# Altium PCB PCB4.PcbDoc (part 2 of 3)
Units mm, origin at the board's own origin, x right, y up, seen from the top; angles counter-clockwise.
Board outline 185.25 x 140.25 mm, 2 copper layers (Top Layer, Bottom Layer); 401 components, 60 nets, 1114 pads, 228 vias.
Unrouted connection lines stored in the file: 2.
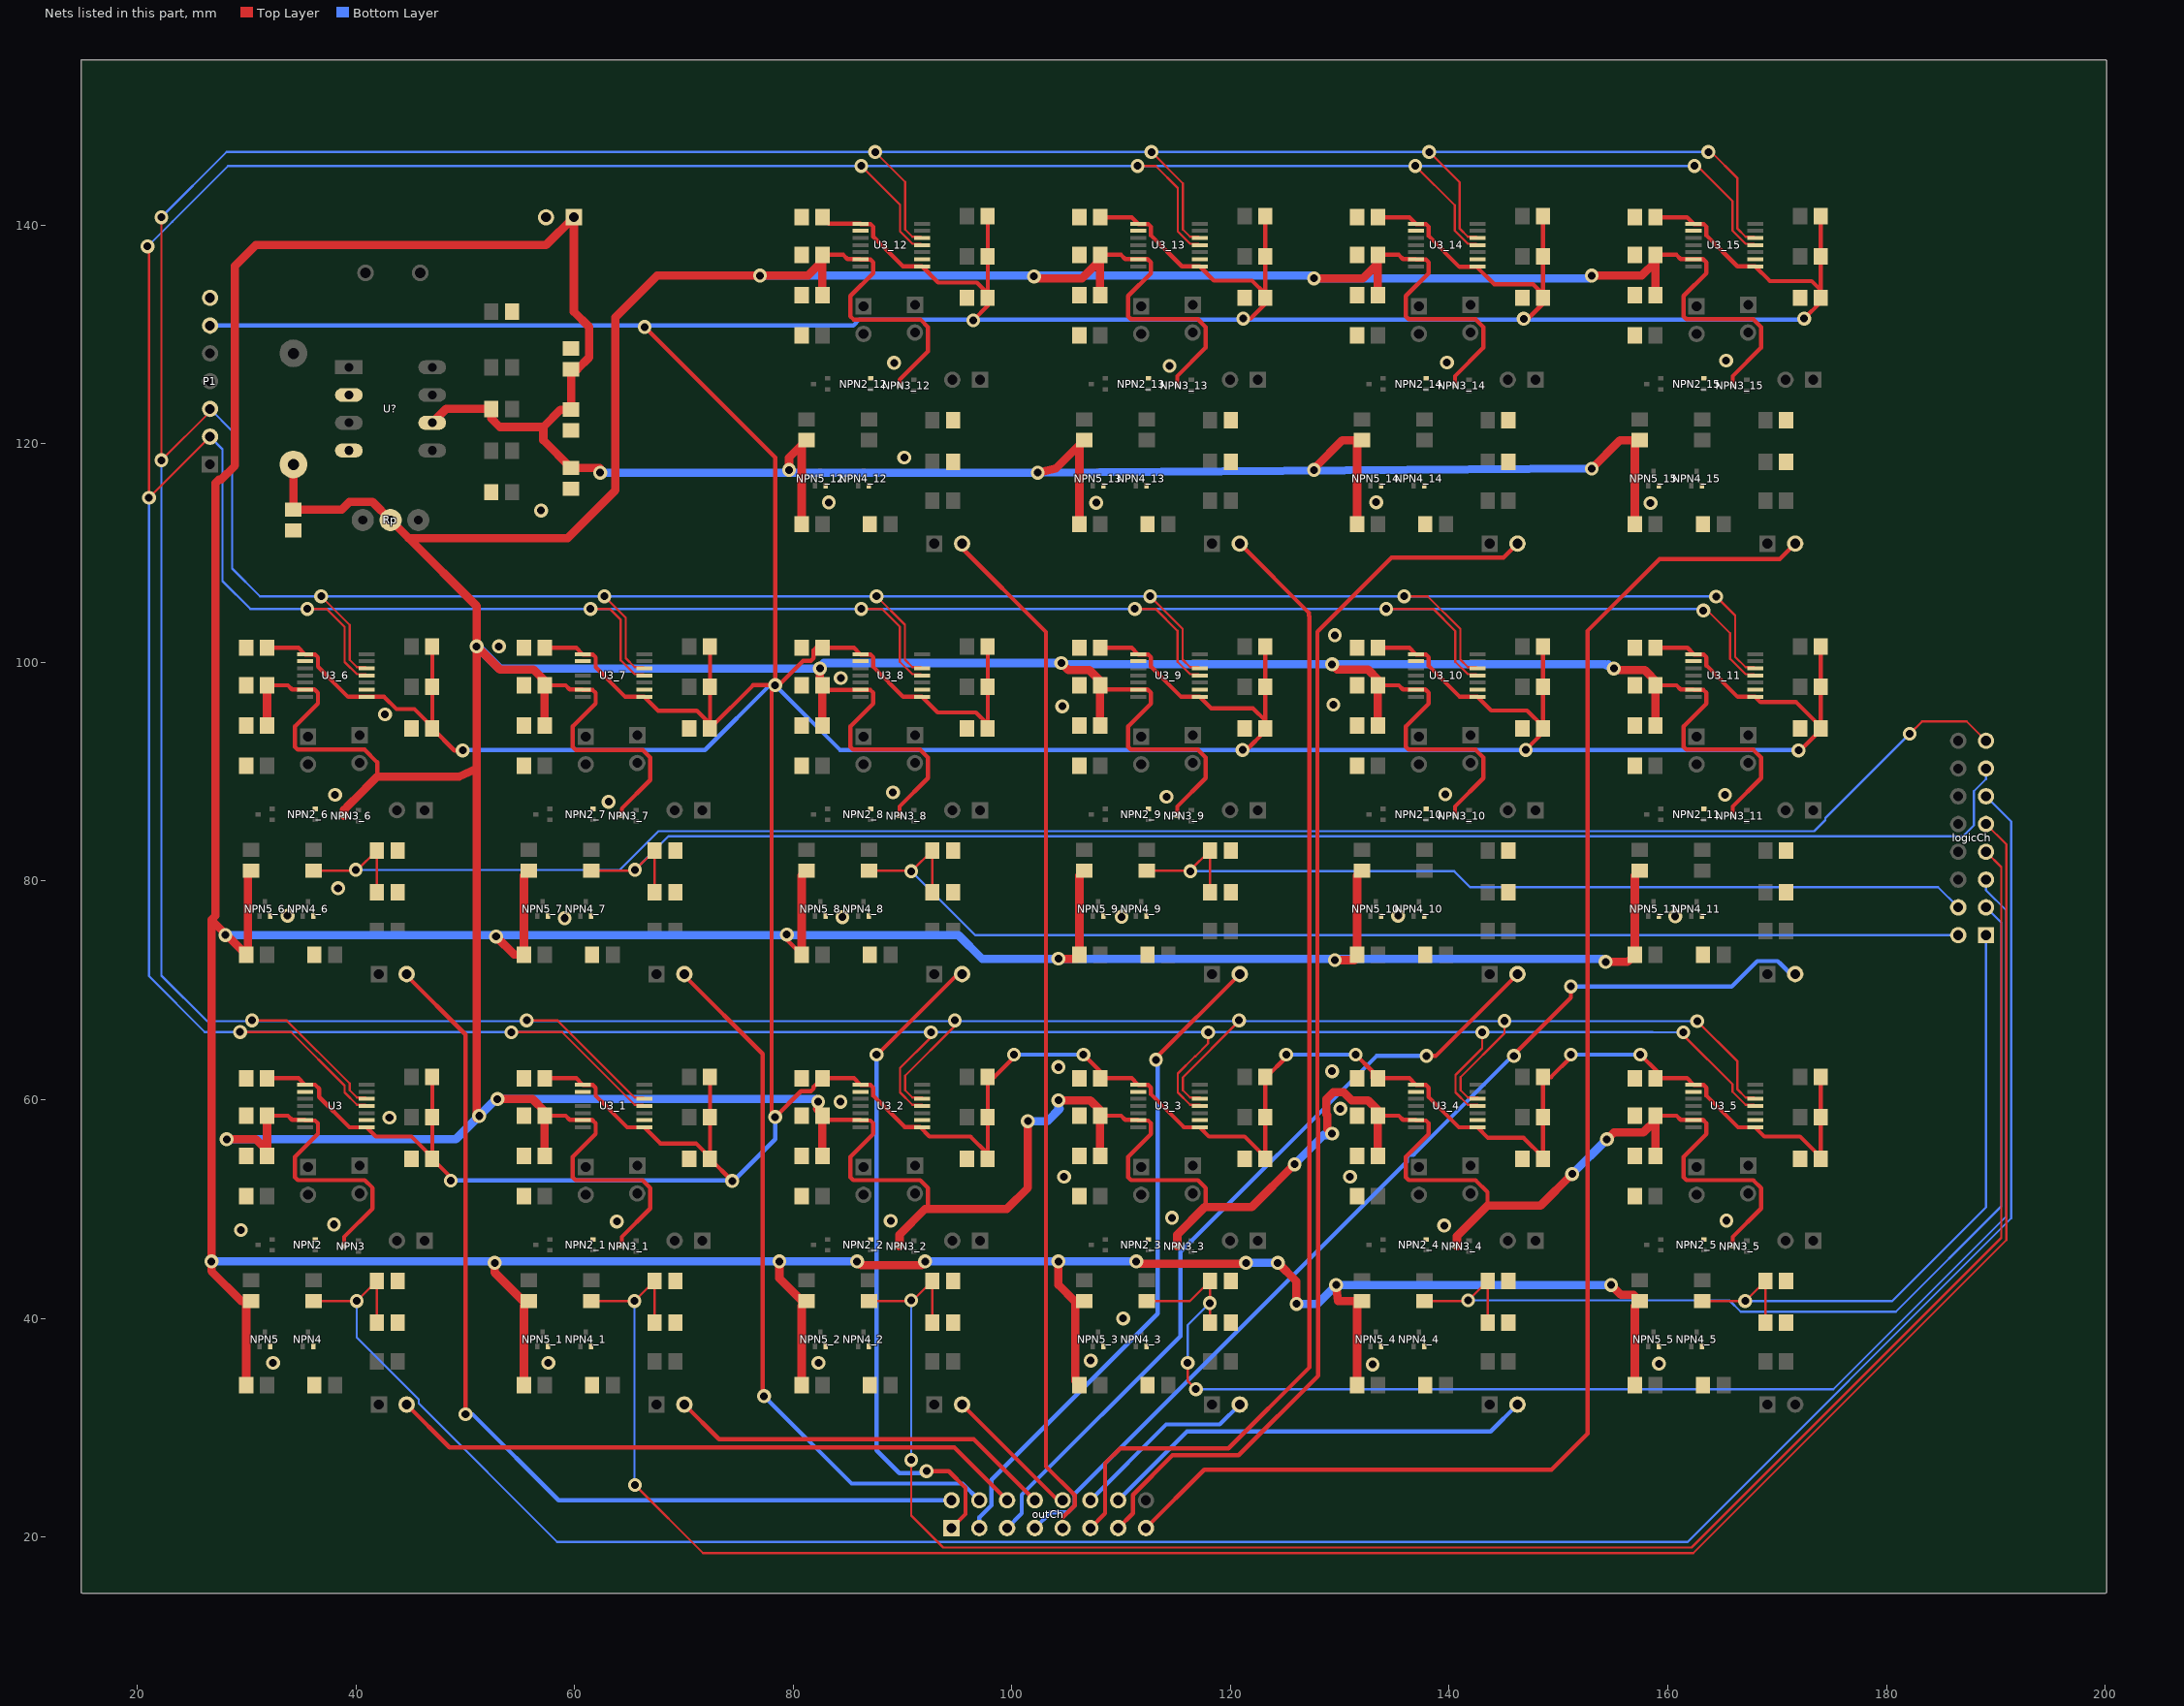
[diagram p2: the nets of this part, all layers, seen from the top]

## Part data
C1 C1_1 C1_2 C1_3 C1_4 C1_5 C1_6 C1_7 C1_8 C1_9 C1_10 C1_11 C1_12 C1_13 C1_14 C1_15 C2 C2_1 C2_2 C2_3 C2_4 C2_5 C2_6 C2_7 C2_8 C2_9 C2_10 C2_11 C2_12 C2_13 C2_14 C2_15 C3 C3_1 C3_2 C3_3 C3_4 C3_5 C3_6 C3_7 C3_8 C3_9 C3_10 C3_11 C3_12 C3_13 C3_14 C3_15 CD1 CD1_1 CD1_2 CD1_3 CD1_4 CD1_5 CD1_6 CD1_7 CD1_8 CD1_9 CD1_10 CD1_11 CD1_12 CD1_13 CD1_14 CD1_15 CD2 CD2_1 CD2_2 CD2_3 CD2_4 CD2_5 CD2_6 CD2_7 CD2_8 CD2_9 CD2_10 CD2_11 CD2_12 CD2_13 CD2_14 CD2_15 CD3 CD3_1 CD3_2 CD3_3 CD3_4 CD3_5 CD3_6 CD3_7 CD3_8 CD3_9 CD3_10 CD3_11 CD3_12 CD3_13 CD3_14 CD3_15 CD4 CD4_1 CD4_2 CD4_3 CD4_4 CD4_5 CD4_6 CD4_7 CD4_8 CD4_9 CD4_10 CD4_11 CD4_12 CD4_13 CD4_14 CD4_15 CD5 CD5_1 CD5_2 CD5_3 CD5_4 CD5_5 CD5_6 CD5_7 CD5_8 CD5_9 CD5_10 CD5_11 CD5_12 CD5_13 CD5_14 CD5_15 Co Cs1 Cs2 Cs3 Ct: "Capacitor"
H1 H1_1 H1_2 H1_3 H1_4 H1_5 H1_6 H1_7 H1_8 H1_9 H1_10 H1_11 H1_12 H1_13 H1_14 H1_15 HD1 HD1_1 HD1_2 HD1_3 HD1_4 HD1_5 HD1_6 HD1_7 HD1_8 HD1_9 HD1_10 HD1_11 HD1_12 HD1_13 HD1_14 HD1_15 HD2 HD2_1 HD2_2 HD2_3 HD2_4 HD2_5 HD2_6 HD2_7 HD2_8 HD2_9 HD2_10 HD2_11 HD2_12 HD2_13 HD2_14 HD2_15: library part "Header 2", "Header, 2-Pin"
H2 H2_1 H2_2 H2_3 H2_4 H2_5 H2_6 H2_7 H2_8 H2_9 H2_10 H2_11 H2_12 H2_13 H2_14 H2_15 P2: "Header, 2-Pin"
L: "power inductor"
logicCh outCh: "Header, 8-Pin, Dual row"
NPN1 NPN1_1 NPN1_2 NPN1_3 NPN1_4 NPN1_5 NPN1_6 NPN1_7 NPN1_8 NPN1_9 NPN1_10 NPN1_11 NPN1_12 NPN1_13 NPN1_14 NPN1_15 NPN2 NPN2_1 NPN2_2 NPN2_3 NPN2_4 NPN2_5 NPN2_6 NPN2_7 NPN2_8 NPN2_9 NPN2_10 NPN2_11 NPN2_12 NPN2_13 NPN2_14 NPN2_15 NPN3 NPN3_1 NPN3_2 NPN3_3 NPN3_4 NPN3_5 NPN3_6 NPN3_7 NPN3_8 NPN3_9 NPN3_10 NPN3_11 NPN3_12 NPN3_13 NPN3_14 NPN3_15 NPN4 NPN4_1 NPN4_2 NPN4_3 NPN4_4 NPN4_5 NPN4_6 NPN4_7 NPN4_8 NPN4_9 NPN4_10 NPN4_11 NPN4_12 NPN4_13 NPN4_14 NPN4_15 NPN5 NPN5_1 NPN5_2 NPN5_3 NPN5_4 NPN5_5 NPN5_6 NPN5_7 NPN5_8 NPN5_9 NPN5_10 NPN5_11 NPN5_12 NPN5_13 NPN5_14 NPN5_15: library part Component_1
P1: "Header, 7-Pin"
R1 R1_1 R1_2 R1_3 R1_4 R1_5 R1_6 R1_7 R1_8 R1_9 R1_10 R1_11 R1_12 R1_13 R1_14 R1_15 R2 R2_1 R2_2 R2_3 R2_4 R2_5 R2_6 R2_7 R2_8 R2_9 R2_10 R2_11 R2_12 R2_13 R2_14 R2_15 R3 R3_1 R3_2 R3_3 R3_4 R3_5 R3_6 R3_7 R3_8 R3_9 R3_10 R3_11 R3_12 R3_13 R3_14 R3_15 R4 R4_1 R4_2 R4_3 R4_4 R4_5 R4_6 R4_7 R4_8 R4_9 R4_10 R4_11 R4_12 R4_13 R4_14 R4_15 RD1 RD1_1 RD1_2 RD1_3 RD1_4 RD1_5 RD1_6 RD1_7 RD1_8 RD1_9 RD1_10 RD1_11 RD1_12 RD1_13 RD1_14 RD1_15 RD2 RD2_1 RD2_2 RD2_3 RD2_4 RD2_5 RD2_6 RD2_7 RD2_8 RD2_9 RD2_10 RD2_11 RD2_12 RD2_13 RD2_14 RD2_15 Rs1 Rs2 Rs4 Rsc: "Resistor"
Rp: "Potentiometer"
U3 U3_1 U3_2 U3_3 U3_4 U3_5 U3_6 U3_7 U3_8 U3_9 U3_10 U3_11 U3_12 U3_13 U3_14 U3_15: "Imported"

## Via types
v1: diameter 1.27, hole 0.711, Top Layer to Bottom Layer, 228 vias

## Nets (pads, with @x,y where several pads share a name; then routed paths per layer and width w, separated by ;. In a path a pad name is that pad's centre, name@x,y a point inside that pad or via, vN(x,y) a via of type N, cw(c..) or ccw(c..) an arc to the next point about the centre after c; other vN are vias at no path point)
3V: CD1.1 CD1_1.1 CD1_2.1 CD1_3.1 CD1_4.1 CD1_5.1 CD1_6.1 CD1_7.1 CD1_8.1 CD1_9.1 CD1_10.1 CD1_11.1 CD1_12.1 CD1_13.1 CD1_14.1 CD1_15.1 CD2.1 CD2_1.1 CD2_2.1 CD2_3.1 CD2_4.1 CD2_5.1 CD2_6.1 CD2_7.1 CD2_8.1 CD2_9.1 CD2_10.1 CD2_11.1 CD2_12.1 CD2_13.1 CD2_14.1 CD2_15.1 P1.6 RD1.2 RD1_1.2 RD1_2.2 RD1_3.2 RD1_4.2 RD1_5.2 RD1_6.2 RD1_7.2 RD1_8.2 RD1_9.2 RD1_10.2 RD1_11.2 RD1_12.2 RD1_13.2 RD1_14.2 RD1_15.2 RD2.1 RD2_1.1 RD2_2.1 RD2_3.1 RD2_4.1 RD2_5.1 RD2_6.1 RD2_7.1 RD2_8.1 RD2_9.1 RD2_10.1 RD2_11.1 RD2_12.1 RD2_13.1 RD2_14.1 RD2_15.1 U3.1 U3.8 U3_1.1 U3_1.8 U3_2.1 U3_2.8 U3_3.1 U3_3.8 U3_4.1 U3_4.8 U3_5.1 U3_5.8 U3_6.1 U3_6.8 U3_7.1 U3_7.8 U3_8.1 U3_8.8 U3_9.1 U3_9.8 U3_10.1 U3_10.8 U3_11.1 U3_11.8 U3_12.1 U3_12.8 U3_13.1 U3_13.8 U3_14.1 U3_14.8 U3_15.1 U3_15.8 | length 884.1
  Top Layer w0.381: CD1.1@31.882,61.973 34.762,61.973 U3.1@35.352,61.383 36.28,61.383 36.647,61.016 36.647,60.254 39.418,57.483 U3.8@40.99,57.483 41.832,56.642 45.089,56.642 CD2.1@46.995,54.736 ; CD1_6.1@31.882,101.343 34.762,101.343 U3_6.1@35.352,100.753 35.379,100.725 36.272,100.725 36.533,100.465 36.533,99.622 39.301,96.853 U3_6.8@40.99,96.853 42.596,96.853 43.715,95.734 45.367,95.734 CD2_6.1@46.995,94.106 ; RD1.2@46.995,62.079 RD2.1@46.995,58.417 CD2.1@46.995,54.607 48.692,52.91 v1(48.692,52.603) ; RD1_6.2@46.995,101.449 RD2_6.1@46.995,97.787 CD2_6.1@46.995,94.106 ; v1(49.784,91.948) 49.027,91.948 46.995,93.98 CD2_6.1@46.995,94.106 ; CD1_1.1@57.282,61.973 60.162,61.973 U3_1.1@60.752,61.383 60.779,61.355 61.672,61.355 61.933,61.095 61.933,60.368 62.438,59.863 62.449,59.863 64.828,57.483 U3_1.8@66.39,57.483 67.867,56.007 71.124,56.007 CD2_1.1@72.395,54.736 ; CD1_7.1@57.282,101.343 60.162,101.343 U3_7.1@60.752,100.753 60.779,100.725 61.672,100.725 61.933,100.465 61.933,99.572 64.652,96.853 U3_7.8@66.39,96.853 67.663,95.58 71.196,95.58 CD2_7.1@72.395,94.381 ; v1(66.421,130.683) 78.359,118.745 v1(78.359,97.917) ; RD1_1.2@72.395,62.079 RD2_1.1@72.395,58.417 CD2_1.1@72.395,54.607 74.422,52.58 v1(74.422,52.578) ; CD2_7.1@72.395,93.977 76.335,97.917 v1(78.359,97.917) ; CD2_7.1@72.395,93.98 CD2_7.1@72.395,94.381 ; RD1_7.2@72.395,101.449 RD2_7.1@72.395,97.787 CD2_7.1@72.395,94.381 ; CD1_12.1@82.682,140.713 83.272,140.123 U3_12.1@86.152,140.123 86.179,140.095 87.072,140.095 87.333,139.835 87.333,138.942 90.052,136.223 U3_12.8@91.79,136.223 93.267,134.747 96.804,134.747 CD2_12.1@97.787,133.764 ; v1(96.469,131.293) 97.787,132.611 CD2_12.1@97.787,133.347 ; CD2_8.1@97.795,93.977 CD2_8.1@97.795,94.356 ; RD1_8.2@97.795,101.449 RD2_8.1@97.795,97.787 CD2_8.1@97.795,94.356 ; CD2_12.1@97.795,133.35 RD2_12.1@97.795,137.157 RD1_12.2@97.795,140.819 ; v1@100.203,63.881 98.401,62.079 RD1_2.2@97.795,62.079 RD2_2.1@97.795,58.417 97.795,55.067 96.22,56.642 92.46,56.642 91.591,57.511 90.2,57.511 87.849,59.863 87.838,59.863 87.333,60.368 87.333,61.095 87.072,61.355 86.179,61.355 U3_2.1@86.152,61.383 85.562,61.973 CD1_2.1@82.682,61.973 82.682,61.97 82.281,61.57 82.267,61.57 81.877,61.179 81.877,61.039 81.616,60.779 80.718,60.779 v1(78.359,58.42) 78.029,58.75 78.029,97.333 78.486,97.79 v1(78.359,97.917) ; v1(106.553,64.135) 108.082,62.606 CD1_3.1@108.082,61.973 110.962,61.973 U3_3.1@111.552,61.383 111.579,61.355 112.472,61.355 112.733,61.095 112.733,60.495 115.745,57.483 U3_3.8@117.19,57.483 118.032,56.642 121.289,56.642 123.195,54.736 CD2_3.1@123.195,54.607 RD1_3.2@123.195,62.079 ; CD1_9.1@108.082,101.343 110.962,101.343 U3_9.1@111.552,100.753 111.579,100.725 112.472,100.725 112.733,100.465 112.733,99.611 115.491,96.853 U3_9.8@117.19,96.853 118.235,95.809 122.047,95.809 CD2_9.1@123.195,94.661 ; CD1_13.1@108.082,140.713 110.962,140.713 U3_13.1@111.552,140.123 111.579,140.095 112.472,140.095 112.733,139.835 112.733,139.042 115.552,136.223 U3_13.8@117.19,136.223 118.489,134.925 121.971,134.925 CD2_13.1@123.195,133.701 ; v1(121.158,131.445) 121.818,131.445 123.195,132.822 CD2_13.1@123.195,133.347 ; v1@121.412,91.948 123.195,93.731 CD2_9.1@123.195,93.977 ; CD2_9.1@123.195,93.98 CD2_9.1@123.195,94.661 ; RD1_9.2@123.195,101.449 RD2_9.1@123.195,97.787 CD2_9.1@123.195,94.661 ; CD2_13.1@123.195,133.35 CD2_13.1@123.195,133.701 ; RD1_13.2@123.195,140.819 RD2_13.1@123.195,137.157 CD2_13.1@123.195,133.701 ; RD1_3.2@123.293,62.079 v1@125.095,63.881 ; v1(131.445,64.135) 132.974,62.606 CD1_4.1@132.974,61.973 ; CD1_4.1@133.482,61.973 136.362,61.973 U3_4.1@136.952,61.383 136.979,61.355 137.872,61.355 138.133,61.095 138.133,60.241 140.891,57.483 U3_4.8@142.59,57.483 143.559,56.515 146.816,56.515 148.595,54.736 RD2_4.1@148.595,58.417 RD1_4.2@148.595,62.079 149.328,62.079 v1@151.13,63.881 ; CD1_10.1@133.482,101.343 136.362,101.343 U3_10.1@136.952,100.753 136.979,100.725 137.872,100.725 138.133,100.465 138.133,99.687 140.967,96.853 U3_10.8@142.59,96.853 143.838,95.606 147.117,95.606 148.595,94.127 RD2_10.1@148.595,97.787 RD1_10.2@148.595,101.449 ; CD1_14.1@133.482,140.713 136.362,140.713 U3_14.1@136.952,140.123 136.979,140.095 137.872,140.095 138.133,139.835 138.133,138.992 140.95,136.175 142.542,136.175 144.122,134.595 147.676,134.595 CD2_14.1@148.59,133.68 ; v1(146.812,131.44) 147.213,131.44 148.59,132.817 CD2_14.1@148.59,133.345 ; v1(147.015,91.999) 148.595,93.604 CD2_10.1@148.595,93.977 ; CD2_14.1@148.595,133.35 RD2_14.1@148.595,137.157 RD1_14.2@148.595,140.819 ; v1(157.48,64.135) 159.009,62.606 CD1_5.1@159.009,61.973 ; CD1_5.1@158.882,61.973 161.762,61.973 U3_5.1@162.352,61.383 162.379,61.355 163.272,61.355 163.533,61.095 163.533,60.368 166.418,57.483 U3_5.8@167.99,57.483 168.832,56.642 172.089,56.642 173.995,54.736 RD2_5.1@173.995,58.417 RD1_5.2@173.995,62.079 ; CD1_11.1@158.882,101.343 161.801,101.343 U3_11.1@162.357,100.787 ; CD1_15.1@158.882,140.713 161.762,140.713 U3_15.1@162.352,140.123 162.379,140.095 163.272,140.095 163.533,139.835 163.533,139.042 166.352,136.223 U3_15.8@167.99,136.223 169.34,134.874 173.152,134.874 CD2_15.1@173.95,134.076 ; U3_11.1@162.352,100.753 162.379,100.725 163.272,100.725 163.533,100.465 163.533,99.713 166.392,96.853 U3_11.8@167.99,96.853 168.476,96.368 171.733,96.368 173.995,94.106 RD2_11.1@173.995,97.787 RD1_11.2@173.995,101.449 ; v1(171.958,91.948) 172.095,91.948 173.995,93.848 CD2_11.1@173.995,93.977 ; v1(172.466,131.445) 173.95,132.929 CD2_15.1@173.95,133.302 ; CD2_15.1@173.995,133.35 RD2_15.1@173.995,137.157 RD1_15.2@173.995,140.819 ; v1(78.359,97.917) 78.674,97.917 80.905,100.149 81.616,100.149 81.877,100.409 81.877,101.12 82.1,101.343 CD1_8.1@82.682,101.343 85.562,101.343 U3_8.1@86.152,100.753 86.179,100.725 87.072,100.725 87.333,100.465 87.333,99.596 90.076,96.853 U3_8.8@91.79,96.853 93.216,95.428 96.723,95.428 CD2_8.1@97.795,94.356
  Bottom Layer w0.381: P1.6@26.67,130.81 85.507,130.81 86.063,131.367 v1@172.388,131.367 ; v1(48.692,52.603) 48.715,52.627 v1@74.373,52.627 ; v1(49.784,91.948) 49.833,91.997 71.931,91.997 77.851,97.917 v1(78.359,97.917) 84.277,91.999 v1(121.107,91.999) v1(147.015,91.999) v1@172.187,91.999 ; v1@74.549,52.578 78.359,56.388 v1(78.359,58.42) ; v1(100.203,64.135) v1(106.553,64.135) v1@106.807,64.135 ; v1(125.095,64.135) v1(131.445,64.135) v1@131.699,64.135 ; v1(151.13,64.135) v1(157.48,64.135) v1@157.734,64.135
5V: Cs1.2 Cs2.1 Cs3.1 P2.1 R2.2 R2_1.2 R2_2.2 R2_3.2 R2_4.2 R2_5.2 R2_6.2 R2_7.2 R2_8.2 R2_9.2 R2_10.2 R2_11.2 R2_12.2 R2_13.2 R2_14.2 R2_15.2 R3.2 R3_1.2 R3_2.2 R3_3.2 R3_4.2 R3_5.2 R3_6.2 R3_7.2 R3_8.2 R3_9.2 R3_10.2 R3_11.2 R3_12.2 R3_13.2 R3_14.2 R3_15.2 Rsc.1 U?.6 | length 704.6
  Top Layer w0.381: v1(79.426,75.108) 79.426,74.632 R3_8.2@80.782,73.276
  Top Layer w0.762: R3.2@29.982,33.906 29.982,41.15 R2.2@30.424,41.592 29.528,41.592 26.797,44.323 v1(26.797,45.216) 26.797,76.461 ; R2_6.2@30.424,80.962 30.15,80.688 30.15,73.444 R3_6.2@29.982,73.276 26.797,76.461 ; U?.6@46.99,121.92 48.26,123.19 Rsc.1@52.39,123.19 52.39,122.325 53.176,121.539 57.15,121.539 ; v1(52.705,45.085) 52.705,44.196 55.309,41.592 R2_1.2@55.824,41.592 55.382,41.15 R3_1.2@55.382,33.906 ; v1(52.832,74.93) 54.486,73.276 R3_7.2@55.382,73.276 55.382,80.52 R2_7.2@55.824,80.962 ; v1(62.357,117.348) 62.296,117.79 Cs3.1@59.689,117.79 57.15,120.329 57.15,121.539 ; v1(78.74,45.212) 78.74,43.678 80.826,41.592 R2_2.2@81.224,41.592 80.782,41.15 R3_2.2@80.782,33.906 ; v1(79.629,117.602) 79.629,118.737 R2_12.2@80.782,119.89 ; R3_8.2@80.782,73.276 80.782,80.52 R2_8.2@81.224,80.962 ; R3_12.2@80.782,112.646 R2_12.2@80.782,119.89 ; R2_12.2@81.224,120.332 R2_12.2@80.782,119.89 ; v1(85.848,45.216) 86.208,44.856 91.751,44.856 v1@91.9,45.006 ; v1(102.362,117.348) 104.021,117.729 R2_13.2@106.182,119.89 ; v1(104.267,45.212) 104.267,43.065 105.791,41.541 105.791,34.297 R3_3.2@106.182,33.906 ; v1(104.267,72.898) 105.918,72.898 105.861,72.955 R3_9.2@106.182,73.276 106.182,80.52 R2_9.2@106.624,80.962 ; R3_13.2@106.182,112.646 R2_13.2@106.182,119.89 ; R2_13.2@106.624,120.332 R2_13.2@106.182,119.89 ; v1(111.379,45.212) 111.608,44.983 121.389,44.983 v1@121.412,45.006 ; v1(124.333,45.085) 126.035,43.383 v1(126.035,41.326) ; v1@127.762,117.856 130.238,120.332 R2_14.2@132.024,120.332 131.582,119.89 R3_14.2@131.582,112.646 ; v1(129.54,72.771) 131.318,72.771 131.197,72.892 R3_10.2@131.582,73.276 131.582,80.52 R2_10.2@132.024,80.962 ; v1(129.667,43.053) 129.818,41.592 R2_4.2@132.024,41.592 131.582,41.15 R3_4.2@131.582,33.906 ; v1(153.035,117.729) 155.638,120.332 R2_15.2@157.424,120.332 ; v1(154.305,72.604) 156.31,72.604 R3_11.2@156.982,73.276 156.982,80.52 R2_11.2@157.424,80.962 ; v1(154.813,43.053) 155.702,42.164 156.852,42.164 R2_5.2@157.424,41.592 156.982,41.15 R3_5.2@156.982,33.906 ; R3_15.2@156.982,112.646 R2_15.2@156.982,119.89 ; 26.797,76.461 27.178,76.842 27.178,116.407 27.496,116.725 27.683,116.725 28.956,117.998 28.956,136.271 30.861,138.176 57.404,138.176 P2.1@59.944,140.716 59.944,132.08 61.341,130.683 61.341,127.889 60.264,126.812 Cs1.2@59.689,126.812 Cs2.1@59.689,123.124 58.735,123.124 57.15,121.539
  Bottom Layer w0.762: v1(26.797,45.216) v1(85.848,45.216) ; v1(28.067,75.057) 95.123,75.057 97.282,72.898 154.011,72.898 v1(154.305,72.604) ; v1(62.357,117.348) v1(102.362,117.348) v1(153.035,117.729) ; v1(92.075,45.212) v1(104.267,45.212) v1(111.379,45.212) ; v1(121.412,45.085) v1(124.333,45.085) ; v1(126.035,41.326) 127.94,41.326 v1(129.667,43.053) v1(154.813,43.053)
  other v1: 127.635,117.602
19V: CD4.2 CD4_1.2 CD4_2.2 CD4_3.2 CD4_4.2 CD4_5.2 CD4_6.2 CD4_7.2 CD4_8.2 CD4_9.2 CD4_10.2 CD4_11.2 CD4_12.2 CD4_13.2 CD4_14.2 CD4_15.2 CD5.2 CD5_1.2 CD5_2.2 CD5_3.2 CD5_4.2 CD5_5.2 CD5_6.2 CD5_7.2 CD5_8.2 CD5_9.2 CD5_10.2 CD5_11.2 CD5_12.2 CD5_13.2 CD5_14.2 CD5_15.2 Co.2 D1.1 NPN3.1 NPN3_1.1 NPN3_2.1 NPN3_3.1 NPN3_4.1 NPN3_5.1 NPN3_6.1 NPN3_7.1 NPN3_8.1 NPN3_9.1 NPN3_10.1 NPN3_11.1 NPN3_12.1 NPN3_13.1 NPN3_14.1 NPN3_15.1 Rp.2 U3.6 U3_1.6 U3_2.6 U3_3.6 U3_4.6 U3_5.6 U3_6.6 U3_7.6 U3_8.6 U3_9.6 U3_10.6 U3_11.6 U3_12.6 U3_13.6 U3_14.6 U3_15.6 | length 954.8
  Top Layer w0.381: CD5.2@31.882,58.544 33.787,58.544 34.171,58.161 35.324,58.161 U3.6@35.352,58.133 35.379,58.105 36.272,58.105 36.533,57.845 36.533,56.875 34.437,54.779 34.437,52.911 34.697,52.651 40.812,52.651 41.536,51.927 41.536,50.056 38.933,47.453 NPN3.1@38.933,46.606 ; CD5_6.2@31.882,97.914 33.787,97.914 34.171,97.531 36.217,97.531 36.533,97.215 36.533,96.245 34.437,94.149 34.437,92.281 34.697,92.021 40.812,92.021 41.961,90.872 41.961,89.551 ; CD5_1.2@57.282,58.544 59.187,58.544 59.571,58.161 61.617,58.161 61.933,57.845 61.933,56.875 59.837,54.779 59.837,52.911 60.097,52.651 66.212,52.651 66.936,51.927 66.936,50.056 64.333,47.453 NPN3_1.1@64.333,46.606 ; CD5_7.2@57.282,97.914 59.187,97.914 59.571,97.531 60.724,97.531 60.724,97.475 61.672,97.475 61.933,97.215 61.933,96.245 59.837,94.149 59.837,92.281 60.121,91.997 66.236,91.997 66.936,91.297 66.936,89.237 64.333,86.634 NPN3_7.1@64.333,85.976 ; CD5_2.2@82.682,58.544 83.065,58.161 U3_2.6@86.124,58.161 ; CD5_8.2@82.682,97.914 83.121,97.475 87.072,97.475 87.333,97.215 87.333,96.245 85.237,94.149 85.237,92.281 85.497,92.021 91.612,92.021 92.336,91.297 92.336,89.426 89.733,86.823 NPN3_8.1@89.733,85.976 ; CD5_12.2@82.682,137.284 84.587,137.284 84.971,136.901 86.124,136.901 U3_12.6@86.152,136.873 86.152,136.845 87.072,136.845 87.333,136.585 87.333,135.615 85.237,133.519 85.237,131.651 85.521,131.367 91.636,131.367 92.336,130.667 92.336,128.455 89.733,125.852 NPN3_12.1@89.733,125.346 ; U3_2.6@86.152,58.133 86.179,58.105 87.072,58.105 87.333,57.845 87.333,56.875 85.237,54.779 85.237,52.911 85.497,52.651 91.612,52.651 92.336,51.927 92.336,50.045 ; CD5_3.2@108.082,58.544 109.987,58.544 110.371,58.161 111.524,58.161 111.524,58.105 112.472,58.105 112.733,57.845 112.733,56.875 110.637,54.779 110.637,52.911 110.897,52.651 117.012,52.651 117.736,51.927 117.736,50.515 117.647,50.426 117.647,50.181 ; CD5_9.2@108.082,97.914 108.465,97.531 112.417,97.531 112.733,97.215 112.733,96.245 110.637,94.149 110.637,92.281 110.897,92.021 117.012,92.021 117.736,91.297 117.736,89.426 115.133,86.823 NPN3_9.1@115.133,85.976 ; CD5_13.2@108.082,137.284 109.987,137.284 110.371,136.901 112.417,136.901 112.733,136.585 112.733,135.615 110.637,133.519 110.637,131.651 110.897,131.391 117.012,131.391 117.736,130.667 117.736,128.796 115.133,126.193 NPN3_13.1@115.133,125.346 ; CD5_4.2@133.482,58.544 135.387,58.544 135.771,58.161 136.924,58.161 U3_4.6@136.952,58.133 136.979,58.105 137.872,58.105 138.133,57.845 138.133,56.875 136.037,54.779 136.037,52.911 136.297,52.651 142.412,52.651 143.51,51.553 143.51,50.327 ; CD5_10.2@133.482,97.914 135.387,97.914 135.771,97.531 137.817,97.531 138.133,97.215 138.133,96.245 136.037,94.149 136.037,92.281 136.297,92.021 142.412,92.021 143.136,91.297 143.136,89.426 140.533,86.823 NPN3_10.1@140.533,85.976 ; CD5_14.2@133.482,137.284 135.387,137.284 135.771,136.901 136.924,136.901 U3_14.6@136.952,136.873 136.979,136.845 137.872,136.845 138.133,136.585 138.133,135.615 136.037,133.519 136.037,131.651 136.297,131.391 142.412,131.391 143.136,130.667 143.136,128.796 140.533,126.193 NPN3_14.1@140.533,125.346 ; CD5_5.2@158.882,58.544 160.787,58.544 161.171,58.161 163.217,58.161 163.533,57.845 163.533,56.875 161.437,54.779 161.437,52.911 161.697,52.651 167.812,52.651 168.536,51.927 168.536,50.056 165.933,47.453 165.933,46.919 ; CD5_11.2@158.882,97.914 160.787,97.914 161.171,97.531 U3_11.6@162.324,97.531 ; CD5_15.2@158.882,137.284 160.787,137.284 161.171,136.901 163.217,136.901 163.533,136.585 163.533,135.615 161.437,133.519 161.437,131.651 161.697,131.391 167.812,131.391 168.536,130.667 168.536,128.796 165.933,126.193 NPN3_15.1@165.933,125.346 ; U3_11.6@162.352,97.503 162.379,97.475 163.272,97.475 163.533,97.215 163.533,96.245 161.437,94.149 161.437,92.281 161.697,92.021 167.812,92.021 168.536,91.297 168.536,89.426 165.933,86.823 NPN3_11.1@165.933,85.976
  Top Layer w0.762: v1(28.194,56.388) 30.861,56.388 CD4.2@31.882,55.367 ; CD4.2@31.882,54.861 CD4.2@31.882,55.367 ; CD5.2@31.882,58.544 CD4.2@31.882,55.367 ; CD4_6.2@31.882,94.231 CD5_6.2@31.882,97.914 ; D1.1@34.29,118.11 Co.2@34.29,113.98 38.72,113.98 39.421,114.681 41.529,114.681 Rp.2@43.18,113.03 44.831,111.379 ; NPN3_6.1@38.933,85.976 38.933,86.524 39.343,86.934 39.343,86.939 39.715,87.311 39.72,87.311 41.961,89.551 49.449,89.551 51.054,90.268 ; 51.049,64.959 51.049,58.298 51.272,58.522 v1(51.283,58.522) ; 51.054,64.708 51.054,90.268 ; v1(52.959,60.071) 56.153,60.071 57.282,58.942 CD5_1.2@57.282,58.544 CD4_1.2@57.282,54.861 ; CD4_7.2@57.282,94.231 CD5_7.2@57.282,97.914 ; CD5_7.2@57.484,98.116 56.261,99.339 53.188,99.339 v1(51.054,101.473) ; v1(82.296,59.817) 82.296,59.319 82.169,59.192 CD5_2.2@82.682,58.679 ; v1(82.448,99.441) 82.448,98.148 CD5_8.2@82.682,97.914 CD4_8.2@82.682,94.231 ; CD4_2.2@82.682,54.861 CD5_2.2@82.682,58.544 ; CD4_12.2@82.682,133.601 CD5_12.2@82.682,136.708 ; CD5_12.2@82.682,137.284 CD5_12.2@82.682,136.708 ; NPN3_2.1@89.733,46.606 89.733,47.667 92.089,50.024 ; 92.336,50.045 92.315,50.024 99.554,50.024 101.473,51.943 v1(101.473,58.039) ; v1@102.032,135.128 106.401,135.128 CD5_13.2@108.082,136.809 ; v1(104.267,59.944) 107.188,59.944 108.082,59.05 CD5_3.2@108.082,58.544 CD4_3.2@108.082,54.861 ; v1(104.521,99.949) 105.171,99.299 107.095,99.299 CD5_9.2@108.28,98.115 ; CD4_9.2@108.082,94.231 CD5_9.2@108.082,97.914 ; CD4_13.2@108.082,133.601 CD5_13.2@108.082,136.809 ; CD5_13.2@108.082,137.284 CD5_13.2@108.082,136.809 ; NPN3_3.1@115.133,46.606 115.133,47.667 117.647,50.181 121.936,50.181 v1(125.857,54.102) ; v1(127.635,135.128) 132.105,135.128 133.482,136.505 ; v1(129.286,56.896) 128.841,57.34 128.841,58.592 128.778,58.656 128.778,60.071 129.388,60.681 130.36,60.681 131.097,59.944 132.588,59.944 133.482,59.05 CD5_4.2@133.482,58.544 CD4_4.2@133.482,54.861 ; v1(129.286,99.822) 129.769,99.339 132.588,99.339 133.482,98.445 CD5_10.2@133.482,97.914 CD4_10.2@133.482,94.231 ; CD4_14.2@133.482,133.601 133.482,136.505 ; CD5_14.2@133.482,137.284 133.482,136.505 ; NPN3_4.1@140.716,46.606 140.716,47.533 143.51,50.327 148.371,50.327 v1(151.257,53.213) ; v1(153.035,135.382) 157.607,135.382 CD5_15.2@158.882,136.657 ; v1(154.432,56.388) 155.067,57.023 157.759,57.023 CD5_5.2@158.882,58.146 ; v1(155.067,99.441) 155.219,99.289 156.058,99.289 156.069,99.299 157.895,99.299 CD5_11.2@159.055,98.139 ; CD4_5.2@158.882,54.861 CD5_5.2@158.882,58.146 ; CD5_5.2@158.882,58.544 CD5_5.2@158.882,58.146 ; CD4_11.2@158.882,94.231 CD5_11.2@158.882,97.914 ; CD4_15.2@158.882,133.601 CD5_15.2@158.882,136.657 ; CD5_15.2@158.882,137.284 CD5_15.2@158.882,136.657 ; 44.831,111.379 59.385,111.379 63.754,115.748 63.754,131.572 67.564,135.382 v1(76.962,135.382) 81.356,135.382 CD5_12.2@82.682,136.708 ; 44.831,111.379 51.054,105.156 51.054,104.967 51.049,104.961 51.049,104.329 51.054,104.324 v1(51.054,101.473) ; 51.054,90.268 v1(51.054,101.473)
  Bottom Layer w0.762: v1(28.194,56.388) 49.149,56.388 v1(51.283,58.522) 52.959,60.198 v1(52.959,60.071) 82.042,60.071 v1(82.296,59.817) ; v1(51.054,101.473) 53.086,99.441 ; v1@51.283,101.346 53.188,99.441 v1(82.448,99.441) 82.448,99.593 82.804,99.949 v1(104.521,99.949) 104.648,99.822 v1(129.286,99.822) 154.305,99.822 154.432,99.695 154.559,99.822 v1@154.94,99.441 ; v1(76.962,135.382) 127.381,135.382 v1(127.635,135.128) 152.781,135.128 v1(153.035,135.382) ; v1(101.473,58.039) 103.251,58.039 104.394,59.182 104.267,59.309 v1(104.267,59.944) ; v1(125.857,54.102) 128.524,56.769 v1@129.159,56.769 ; v1(151.257,53.213) v1(154.432,56.388) v1@154.686,56.642
  other v1: 102.032,135.306
CH2: H2_4.2 outCh.15 | length 40.1
  Bottom Layer w0.381: outCh.15@109.728,23.368 116.027,29.667 143.787,29.667 H2_4.2@146.248,32.128
CH3: H2_3.2 outCh.14 | length 17.3
  Bottom Layer w0.381: outCh.14@107.188,23.368 114.122,30.302 119.022,30.302 H2_3.2@120.848,32.128
CH4: H2_2.2 outCh.13 | length 12.3
  Top Layer w0.381: H2_2.2@95.448,32.128 outCh.13@104.14,23.436
CH5: H2_1.2 outCh.12 | length 35.7
  Top Layer w0.381: H2_1.2@70.048,32.128 73.22,28.956 96.52,28.956 outCh.12@102.108,23.368
CH6: H2.2 outCh.11 | length 58.5
  Top Layer w0.381: H2.2@44.648,32.128 48.582,28.194 94.742,28.194 outCh.11@99.568,23.368
CH7: H2_7.2 outCh.10 | length 65.6
  Top Layer w0.381: H2_7.2@70.234,71.498 H2_7.2@70.048,71.498 70.048,71.36 77.216,64.192 77.216,33.02 v1(77.343,32.893)
  Bottom Layer w0.381: v1@77.216,33.02 85.344,24.892 95.504,24.892 outCh.10@97.028,23.368
CH8: H2_6.2 outCh.9 | length 90.2
  Top Layer w0.381: H2_6.2@44.648,71.498 44.648,71.36 50.038,65.97 v1(50.038,31.242)
  Bottom Layer w0.381: v1(50.038,31.242) 50.673,31.242 58.547,23.368 outCh.9@94.488,23.368
CH9: H2_8.2 outCh.1 | length 61
  Top Layer w0.381: v1(87.63,64.135) 87.683,64.135 95.046,71.498 H2_8.2@95.448,71.498 ; v1(92.202,26.035) 94.234,26.035 95.758,24.511 95.758,22.098 outCh.1@94.488,20.828
  Bottom Layer w0.381: v1(87.63,64.135) 87.63,27.94 89.713,25.857 92.024,25.857 v1(92.202,26.035)
CH10: H2_9.2 outCh.2 | length 60.6
  Top Layer w0.381: v1@113.104,63.754 H2_9.2@120.848,71.498
  Bottom Layer w0.381: outCh.2@97.028,20.828 97.028,21.804 98.134,22.91 98.134,25.236 113.335,40.437 113.335,63.5 v1(113.182,63.652)
CH11: H2_10.2 outCh.3 | length 73.2
  Top Layer w0.381: v1(137.922,64.008) 138.758,64.008 H2_10.2@146.248,71.498
  Bottom Layer w0.381: outCh.3@99.568,20.828 100.913,22.173 100.913,23.863 115.418,38.368 115.418,46.078 133.347,64.008 v1(137.922,64.008)
CH12: H2_11.2 outCh.4 | length 93.3
  Top Layer w0.381: v1(145.923,64.008) 145.923,64.135 151.13,69.342 v1(151.13,70.358)
  Bottom Layer w0.381: outCh.4@102.108,20.828 103.542,22.262 104.05,22.262 104.12,22.332 104.19,22.262 105.106,22.262 105.754,22.91 105.754,23.826 105.684,23.896 136.125,54.337 136.125,54.742 136.334,54.951 136.739,54.951 v1@145.859,64.072 ; v1(151.13,70.358) 165.839,70.358 168.174,72.693 170.042,72.693 170.303,72.432 171.442,71.292 H2_11.2@171.648,71.498
CH13: H2_12.2 outCh.5 | length 94
  Top Layer w0.381: H2_12.2@95.448,110.868 95.25,110.67 95.25,110.66 103.124,102.786 103.124,26.456 105.754,23.826 105.754,22.91 104.648,21.804
CH14: H2_13.2 outCh.6 | length 106.8
  Top Layer w0.381: outCh.6@107.188,20.828 108.533,22.173 108.533,23.863 ; 108.534,23.864 108.534,26.746 109.906,28.118 119.812,28.118 127.229,35.535 127.229,104.223 127.16,104.292 127.16,104.556 H2_13.2@120.848,110.868
CH15: H2_14.2 outCh.7 | length 114.8
  Top Layer w0.381: outCh.7@109.728,20.828 111.073,22.173 111.073,23.863 114.694,27.483 120.752,27.483 128.016,34.747 128.016,58.251 127.953,58.314 127.953,102.806 134.734,109.588 144.968,109.588 H2_14.2@146.248,110.868
CH16: H2_15.2 outCh.8 | length 139.7
  Top Layer w0.381: outCh.8@112.268,20.828 117.602,26.162 149.352,26.162 152.654,29.464 152.654,64.948 152.649,64.954 152.649,102.865 159.245,109.461 170.241,109.461 H2_15.2@171.648,110.868
CLK: P1.2 U3.11 U3_1.11 U3_2.11 U3_3.11 U3_4.11 U3_5.11 U3_6.11 U3_7.11 U3_8.11 U3_9.11 U3_10.11 U3_11.11 U3_12.11 U3_13.11 U3_14.11 U3_15.11 | length 681.5
  Top Layer w0.203: v1(20.955,138.049) 21.082,137.922 v1(21.082,115.062) P1.2@26.67,120.65 ; v1(29.413,66.192) 34.087,66.192 38.984,61.295 38.984,60.672 40.107,59.55 40.874,59.55 U3.11@40.99,59.433 ; v1(35.56,104.902) 37.326,104.902 38.984,103.245 38.984,100.042 40.107,98.92 40.874,98.92 U3_6.11@40.99,98.803 ; v1(54.229,66.167) 54.254,66.192 58.864,66.192 65.507,59.55 66.274,59.55 U3_1.11@66.39,59.433 ; v1(61.468,104.902) 63.234,104.902 64.237,103.9 64.237,100.19 65.507,98.92 66.274,98.92 U3_7.11@66.39,98.803 ; v1(86.233,104.902) 88.126,104.902 89.764,103.265 89.764,100.063 90.907,98.92 91.674,98.92 U3_8.11@91.79,98.803 ; v1(86.233,145.415) 89.784,141.864 89.784,139.412 90.907,138.29 91.674,138.29 U3_12.11@91.79,138.173 ; U3_2.11@91.79,59.433 91.79,59.55 90.907,59.55 89.784,60.672 89.784,62.911 92.608,65.735 v1(92.608,66.167) ; v1(111.252,104.902) 113.145,104.902 115.164,102.884 115.164,100.063 116.307,98.92 117.074,98.92 U3_9.11@117.19,98.803 ; v1(111.506,145.415) 113.157,145.415 115.184,143.388 115.184,139.412 116.307,138.29 117.074,138.29 U3_13.11@117.19,138.173 ; U3_3.11@117.19,59.433 117.19,59.55 116.307,59.55 115.184,60.672 115.184,62.403 116.764,63.983 116.793,63.983 117.958,65.147 v1(117.958,66.167) ; v1(134.239,104.902) 138.534,104.902 140.564,102.872 140.564,100.063 141.707,98.92 142.474,98.92 U3_10.11@142.59,98.803 ; v1(136.906,145.415) 140.513,141.808 140.513,139.483 141.707,138.29 142.474,138.29 U3_14.11@142.59,138.173 ; U3_4.11@142.59,59.433 142.59,59.55 141.707,59.55 140.584,60.672 140.584,62.26 143.027,64.703 v1(143.027,66.167) ; v1(161.417,66.167) 161.417,65.913 165.913,61.417 165.913,60.743 167.107,59.55 167.874,59.55 U3_5.11@167.99,59.433 ; v1@162.56,145.542 165.913,142.189 165.913,139.483 167.107,138.29 167.874,138.29 U3_15.11@167.99,138.173 ; v1(163.246,104.75) 163.246,105.111 165.69,102.667 165.69,100.336 167.107,98.92 167.874,98.92 U3_11.11@167.99,98.803
  Bottom Layer w0.203: v1(20.955,138.049) 20.959,138.049 23.216,140.306 23.216,140.31 28.321,145.415 v1(86.233,145.415) v1(111.506,145.415) v1(136.906,145.415) v1(162.433,145.415) ; v1(21.082,115.062) 21.082,71.302 26.19,66.195 158.595,66.195 158.623,66.167 v1(161.417,66.167) ; P1.2@26.67,120.65 27.813,119.507 27.813,107.442 30.353,104.902 v1(35.56,104.902) v1(61.468,104.902) v1(86.233,104.902) v1(111.252,104.902) v1(134.239,104.902) 163.252,104.902 163.246,104.896 v1(163.246,104.75)
CS: P1.3 U3.12 U3_1.12 U3_2.12 U3_3.12 U3_4.12 U3_5.12 U3_6.12 U3_7.12 U3_8.12 U3_9.12 U3_10.12 U3_11.12 U3_12.12 U3_13.12 U3_14.12 U3_15.12 | length 677.3
  Top Layer w0.203: v1(22.225,140.716) v1(22.225,118.491) 26.67,122.936 P1.3@26.67,123.19 ; v1(30.505,67.259) 33.669,67.259 39.441,61.487 39.441,60.865 40.107,60.2 40.874,60.2 U3.12@40.99,60.083 ; v1(36.83,106.045) 39.441,103.434 39.441,100.235 40.107,99.57 40.874,99.57 U3_6.12@40.99,99.453 ; v1(55.626,67.259) 58.45,67.259 65.298,60.411 65.298,60.408 65.507,60.2 66.274,60.2 U3_1.12@66.39,60.083 ; v1(62.738,106.045) 64.694,104.089 64.694,100.382 65.507,99.57 66.274,99.57 U3_7.12@66.39,99.453 ; v1(87.503,146.685) 90.241,143.947 90.241,139.605 90.907,138.94 91.674,138.94 U3_12.12@91.79,138.823 ; v1(87.63,106.045) 90.221,103.454 90.221,100.255 90.907,99.57 91.674,99.57 U3_8.12@91.79,99.453 ; U3_2.12@91.79,60.083 91.79,60.2 90.907,60.2 90.241,60.865 90.241,62.199 94.793,66.751 v1(94.793,67.259) ; v1(112.649,106.045) 115.621,103.073 115.621,100.255 116.307,99.57 117.074,99.57 U3_9.12@117.19,99.453 ; v1(112.776,146.685) 115.641,143.82 115.641,139.605 116.307,138.94 117.074,138.94 U3_13.12@117.19,138.823 ; U3_3.12@117.19,60.083 117.19,60.2 116.307,60.2 115.641,60.865 115.641,62.043 120.777,67.179 v1(120.777,67.259) ; v1(135.89,106.045) 138.037,106.045 141.021,103.062 141.021,100.255 141.707,99.57 142.474,99.57 U3_10.12@142.59,99.453 ; v1(138.176,146.685) 140.97,143.891 140.97,139.676 141.707,138.94 142.474,138.94 U3_14.12@142.59,138.823 ; U3_4.12@142.59,60.083 142.59,60.2 141.707,60.2 141.041,60.865 141.041,62.07 145.059,66.089 v1(145.059,67.208) ; v1(162.687,67.183) 166.37,63.5 166.37,60.936 167.107,60.2 167.874,60.2 U3_5.12@167.99,60.083 ; v1@163.957,146.685 166.37,144.272 166.37,139.676 167.107,138.94 167.874,138.94 U3_15.12@167.99,138.823 ; v1(164.414,106.02) 164.44,106.02 166.167,104.292 166.167,100.509 167.107,99.57 167.874,99.57 U3_11.12@167.99,99.453
  Bottom Layer w0.203: v1@22.098,140.589 28.194,146.685 v1(87.503,146.685) v1(112.776,146.685) v1(138.176,146.685) v1(163.703,146.685) ; v1(22.225,118.491) 22.225,71.362 26.404,67.183 v1(162.687,67.183) ; P1.3@26.67,123.19 28.702,121.158 28.702,108.585 31.242,106.045 v1(36.83,106.045) v1(62.738,106.045) v1(87.63,106.045) v1(112.649,106.045) v1(135.89,106.045) 164.414,106.045 v1(164.414,106.02)
GND: C1.2 C1_1.2 C1_2.2 C1_3.2 C1_4.2 C1_5.2 C1_6.2 C1_7.2 C1_8.2 C1_9.2 C1_10.2 C1_11.2 C1_12.2 C1_13.2 C1_14.2 C1_15.2 C2.2 C2_1.2 C2_2.2 C2_3.2 C2_4.2 C2_5.2 C2_6.2 C2_7.2 C2_8.2 C2_9.2 C2_10.2 C2_11.2 C2_12.2 C2_13.2 C2_14.2 C2_15.2 CD1.2 CD1_1.2 CD1_2.2 CD1_3.2 CD1_4.2 CD1_5.2 CD1_6.2 CD1_7.2 CD1_8.2 CD1_9.2 CD1_10.2 CD1_11.2 CD1_12.2 CD1_13.2 CD1_14.2 CD1_15.2 CD2.2 CD2_1.2 CD2_2.2 CD2_3.2 CD2_4.2 CD2_5.2 CD2_6.2 CD2_7.2 CD2_8.2 CD2_9.2 CD2_10.2 CD2_11.2 CD2_12.2 CD2_13.2 CD2_14.2 CD2_15.2 CD3.1 CD3_1.1 CD3_2.1 CD3_3.1 CD3_4.1 CD3_5.1 CD3_6.1 CD3_7.1 CD3_8.1 CD3_9.1 CD3_10.1 CD3_11.1 CD3_12.1 CD3_13.1 CD3_14.1 CD3_15.1 CD4.1 CD4_1.1 CD4_2.1 CD4_3.1 CD4_4.1 CD4_5.1 CD4_6.1 CD4_7.1 CD4_8.1 CD4_9.1 CD4_10.1 CD4_11.1 CD4_12.1 CD4_13.1 CD4_14.1 CD4_15.1 CD5.1 CD5_1.1 CD5_2.1 CD5_3.1 CD5_4.1 CD5_5.1 CD5_6.1 CD5_7.1 CD5_8.1 CD5_9.1 CD5_10.1 CD5_11.1 CD5_12.1 CD5_13.1 CD5_14.1 CD5_15.1 Co.1 Cs1.1 Cs2.2 Cs3.2 Ct.1 NPN2.3 NPN2_1.3 NPN2_2.3 NPN2_3.3 NPN2_4.3 NPN2_5.3 NPN2_6.3 NPN2_7.3 NPN2_8.3 NPN2_9.3 NPN2_10.3 NPN2_11.3 NPN2_12.3 NPN2_13.3 NPN2_14.3 NPN2_15.3 NPN4.3 NPN4_1.3 NPN4_2.3 NPN4_3.3 NPN4_4.3 NPN4_5.3 NPN4_6.3 NPN4_7.3 NPN4_8.3 NPN4_9.3 NPN4_10.3 NPN4_11.3 NPN4_12.3 NPN4_13.3 NPN4_14.3 NPN4_15.3 NPN5.3 NPN5_1.3 NPN5_2.3 NPN5_3.3 NPN5_4.3 NPN5_5.3 NPN5_6.3 NPN5_7.3 NPN5_8.3 NPN5_9.3 NPN5_10.3 NPN5_11.3 NPN5_12.3 NPN5_13.3 NPN5_14.3 NPN5_15.3 P1.7 P2.2 R4.1 R4_1.1 R4_2.1 R4_3.1 R4_4.1 R4_5.1 R4_6.1 R4_7.1 R4_8.1 R4_9.1 R4_10.1 R4_11.1 R4_12.1 R4_13.1 R4_14.1 R4_15.1 Rs1.1 U3.2 U3.9 U3_1.2 U3_1.9 U3_2.2 U3_2.9 U3_3.2 U3_3.9 U3_4.2 U3_4.9 U3_5.2 U3_5.9 U3_6.2 U3_6.9 U3_7.2 U3_7.9 U3_8.2 U3_8.9 U3_9.2 U3_9.9 U3_10.2 U3_10.9 U3_11.2 U3_11.9 U3_12.2 U3_12.9 U3_13.2 U3_13.9 U3_14.2 U3_14.9 U3_15.2 U3_15.9 U?.2 U?.4 | length 0.1
  Top Layer w0.203: U?.4@39.37,119.314 U?.4@39.37,119.38
  other v1: 132.994,35.789 159.182,35.865 32.436,35.941 57.607,35.941 82.321,35.941 107.213,36.144 110.185,40.005 29.489,48.082 139.551,48.491 37.998,48.59 63.881,48.87 88.925,48.92 165.354,48.946 114.656,49.2 104.775,52.959 130.937,52.959 43.078,58.369 130.048,59.182 84.328,59.817 129.286,62.611 104.267,62.992 59.106,76.606 84.506,76.708 110.033,76.733 160.68,76.784 33.758,76.83 135.331,76.835 38.379,79.35 63.119,87.249 114.148,87.706 38.1,87.884 165.227,87.884 139.649,87.935 89.129,88.113 42.672,95.25 104.623,95.987 129.413,96.139 84.353,98.577 53.086,101.473 129.54,102.489 56.947,113.894 158.42,114.579 107.721,114.605 83.261,114.63 133.325,114.656 90.17,118.745 114.427,127.127 89.23,127.406 139.802,127.432 165.329,127.61
LOGICCH1: C1_5.1 C2_5.1 logicCh.1 R1_5.2 | length 60.8
  Top Layer w0.203: R1_5.2@163.139,41.592 v1(167.081,41.592) C2_5.1@168.92,43.431 C1_5.1@168.92,39.621
  Bottom Layer w0.203: v1(167.081,41.592) 180.53,41.592 189.103,50.165 logicCh.1@189.103,75.057
LOGICCH2: C1_4.1 C2_4.1 logicCh.2 R1_4.2 | length 91.5
  Top Layer w0.203: R1_4.2@137.739,41.592 141.681,41.592 C2_4.1@143.52,43.431 C1_4.1@143.52,39.621
  Bottom Layer w0.203: v1(141.732,41.656) 165.616,41.656 166.671,40.602 180.848,40.602 190.5,50.254 190.5,76.2 logicCh.2@189.103,77.597
LOGICCH3: C1_3.1 C2_3.1 logicCh.3 R1_3.2 | length 131.6
  Top Layer w0.203: R1_3.2@112.339,41.592 116.281,41.592 C2_3.1@118.12,43.431 C1_3.1@118.12,39.621 ; v1(116.078,35.941) 116.078,34.29 v1(116.84,33.528)
  Bottom Layer w0.203: v1(116.078,35.941) 116.078,39.37 v1(118.11,41.402) ; v1(116.84,33.528) 175.133,33.528 190.957,49.352 190.957,77.306 189.103,79.161 logicCh.3@189.103,80.137
LOGICCH4: C1_2.1 C2_2.1 logicCh.4 R1_2.2 | length 178.2
  Top Layer w0.203: R1_2.2@86.939,41.592 90.881,41.592 C2_2.1@92.72,43.431 C1_2.1@92.72,39.621 ; v1(90.805,27.051) 90.805,21.971 93.726,19.05 162.179,19.05 190.5,47.371 190.5,81.28 logicCh.4@189.103,82.677
  Bottom Layer w0.203: v1@90.805,27.432 v1(90.805,41.656)
LOGICCH5: C1_1.1 C2_1.1 logicCh.5 R1_1.2 | length 205.9
  Top Layer w0.203: R1_1.2@61.539,41.592 v1(65.481,41.592) C2_1.1@67.32,43.431 C1_1.1@67.32,39.621 ; v1(65.532,24.765) 71.755,18.542 162.318,18.542 190.957,47.182 190.957,83.363 logicCh.5@189.103,85.217
  Bottom Layer w0.203: v1(65.481,41.592) 65.481,24.816 v1(65.532,24.765)
LOGICCH6: C1.1 C2.1 logicCh.6 R1.2 | length 224.8
  Top Layer w0.203: R1.2@36.139,41.592 v1(40.081,41.592) C2.1@41.92,43.431 C1.1@41.92,39.621
  Bottom Layer w0.203: v1(40.081,41.592) 40.081,38.259 45.754,32.586 45.754,32.224 58.42,19.558 161.81,19.558 191.414,49.163 191.414,85.446 logicCh.6@189.103,87.757
LOGICCH7: C1_7.1 C2_7.1 logicCh.7 R1_7.2 | length 140.2
  Top Layer w0.203: R1_7.2@61.539,80.962 65.481,80.962 C2_7.1@67.32,82.801 C1_7.1@67.32,78.991
  Bottom Layer w0.203: v1(65.532,81.026) 68.617,84.111 187.021,84.111 187.997,85.088 187.997,88.215 189.103,89.321 logicCh.7@189.103,90.297
LOGICCH8: C1_6.1 C2_6.1 logicCh.8 R1_6.2 | length 165.9
  Top Layer w0.203: R1_6.2@36.139,80.962 40.081,80.962 C2_6.1@41.92,82.801 C1_6.1@41.92,78.991 ; v1(182.118,93.472) 183.261,94.615 187.325,94.615 logicCh.8@189.103,92.837
  Bottom Layer w0.203: v1(40.005,81.026) 64.131,81.026 67.674,84.569 173.386,84.569 174.405,85.587 174.405,85.759 v1(182.118,93.472)
LOGICCH9: C1_8.1 C2_8.1 logicCh.9 R1_8.2 | length 108.5
  Top Layer w0.203: R1_8.2@86.939,80.962 90.881,80.962 C2_8.1@92.72,82.801 C1_8.1@92.72,78.991
  Bottom Layer w0.203: v1(90.805,80.899) 96.647,75.057 logicCh.9@186.563,75.057
LOGICCH10: C1_9.1 C2_9.1 logicCh.10 R1_9.2 | length 82
  Top Layer w0.203: R1_9.2@112.339,80.962 116.281,80.962 C2_9.1@118.12,82.801 C1_9.1@118.12,78.991
  Bottom Layer w0.203: v1(116.332,80.899) 140.458,80.899 141.906,79.451 184.709,79.451 logicCh.10@186.563,77.597